# Altium PCB Alarm_LCD.PcbDoc
Units mm, origin at the board's own origin, x right, y up, seen from the top; angles counter-clockwise.
Board outline 81.15 x 80.9 mm, 2 copper layers (Top Layer, Bottom Layer); 28 components, 25 nets, 112 pads, 0 vias.
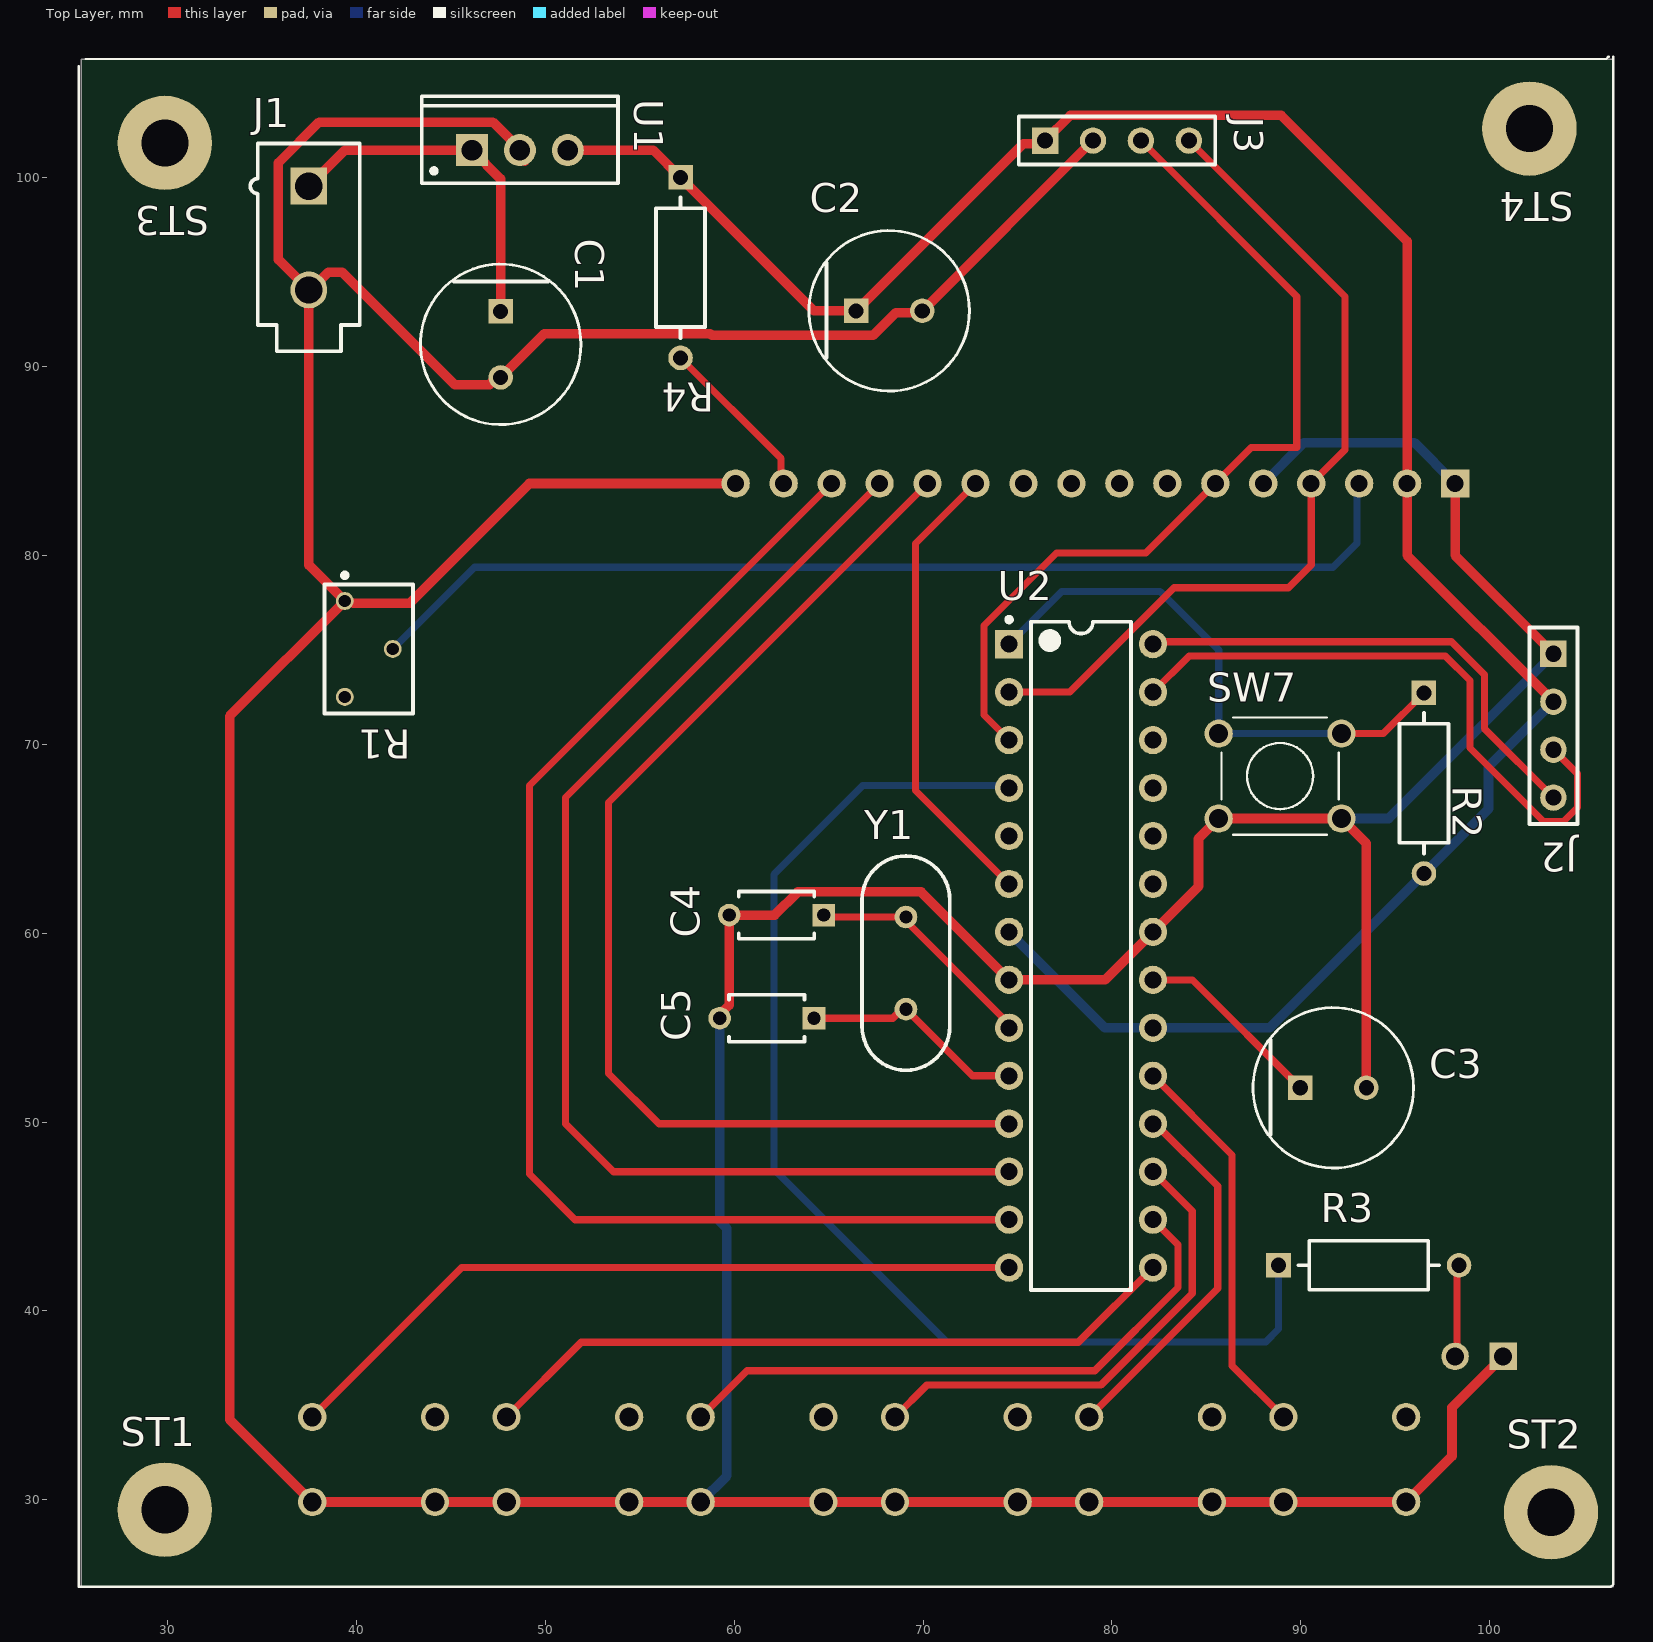
[diagram p0: Top Layer view]
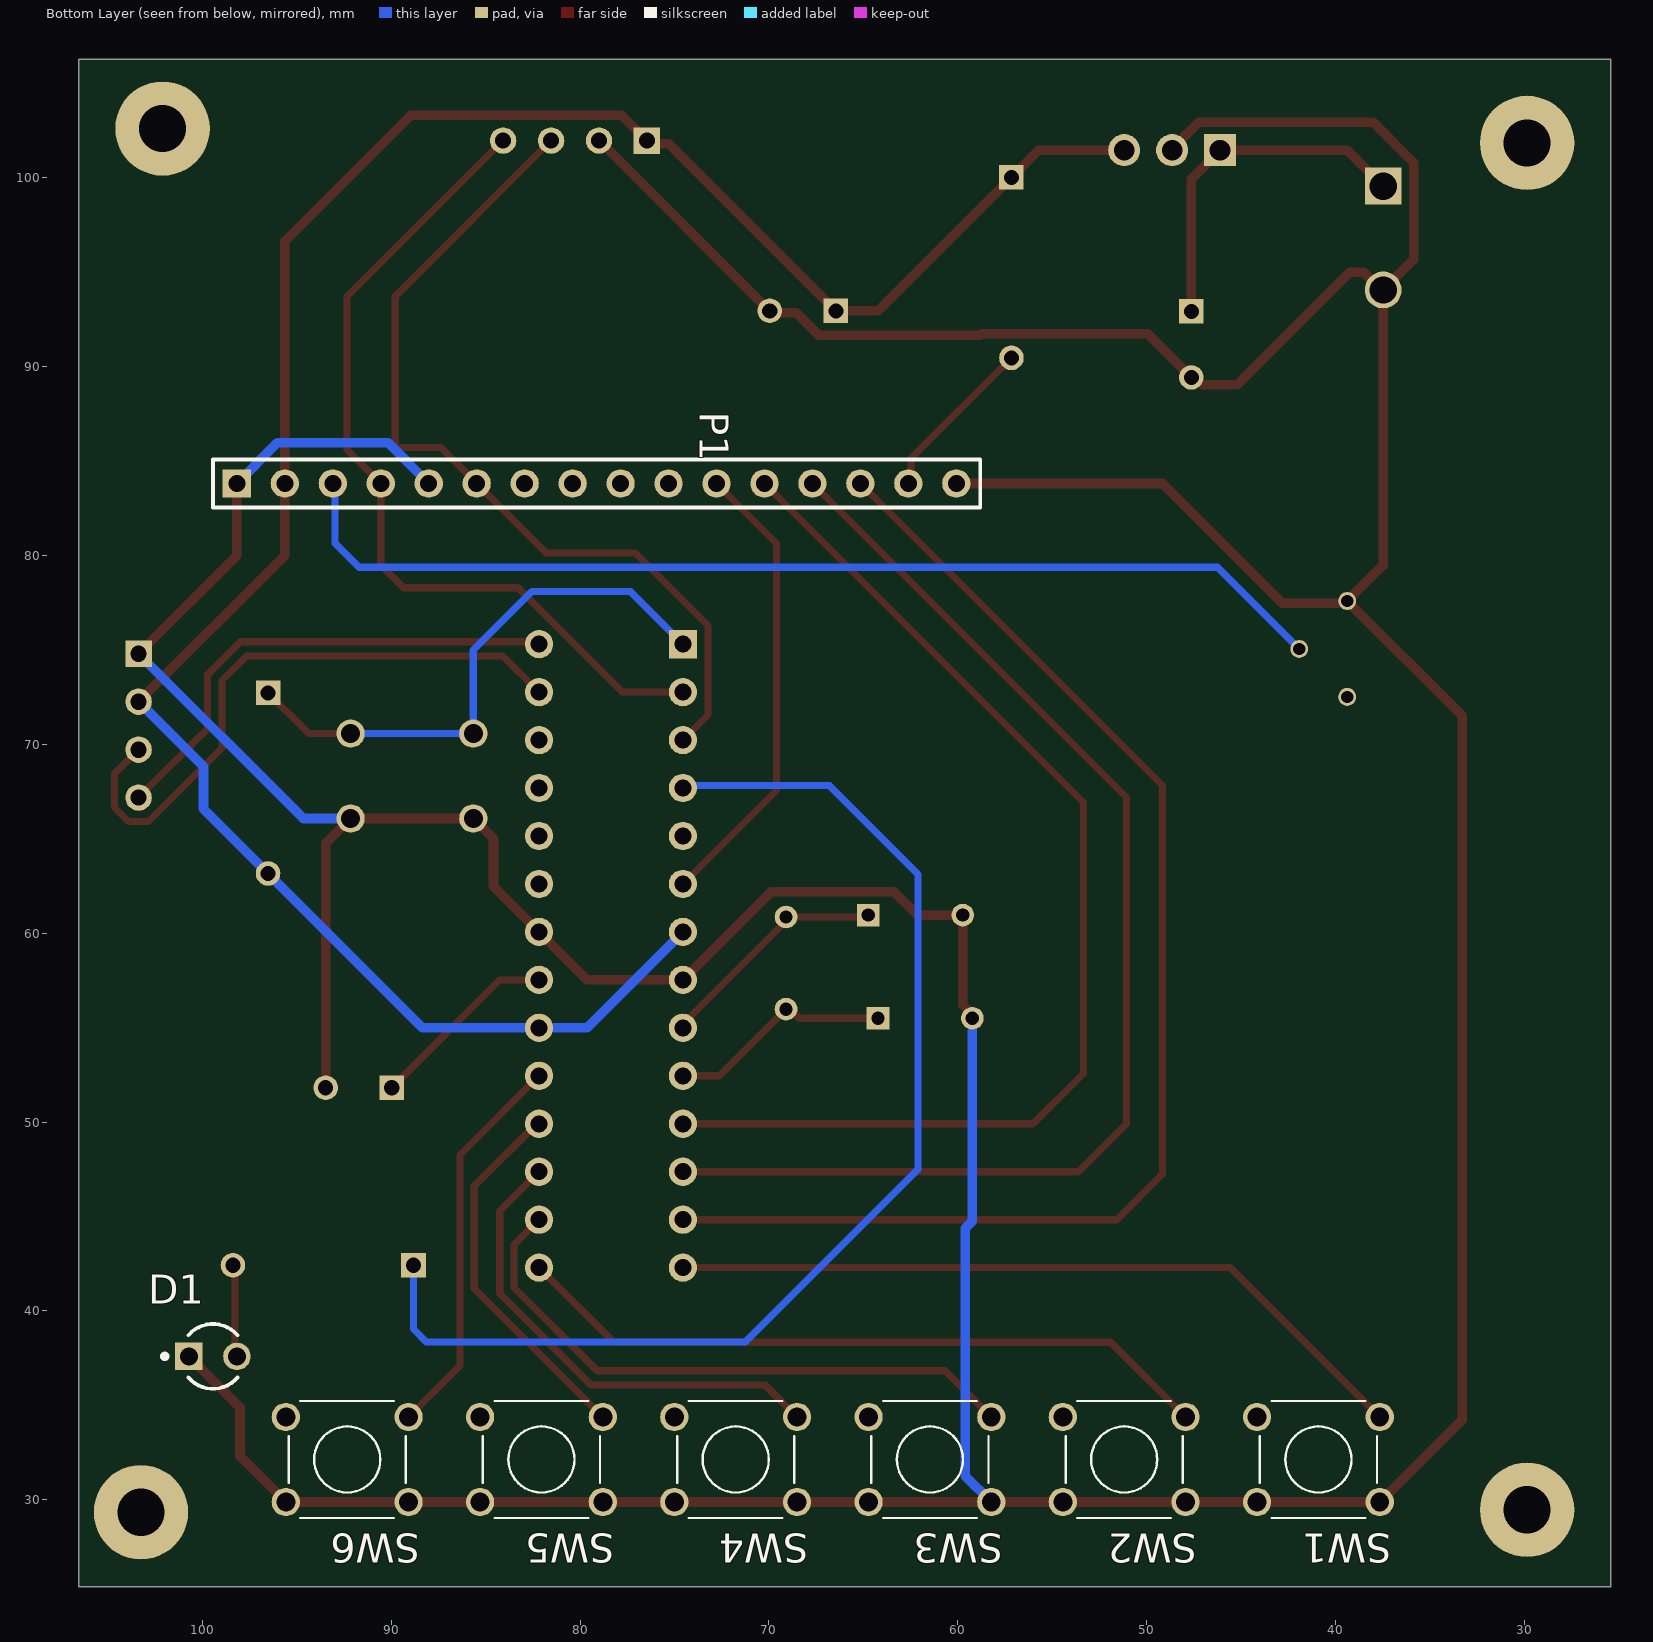
[diagram p1: Bottom Layer view, seen from below]
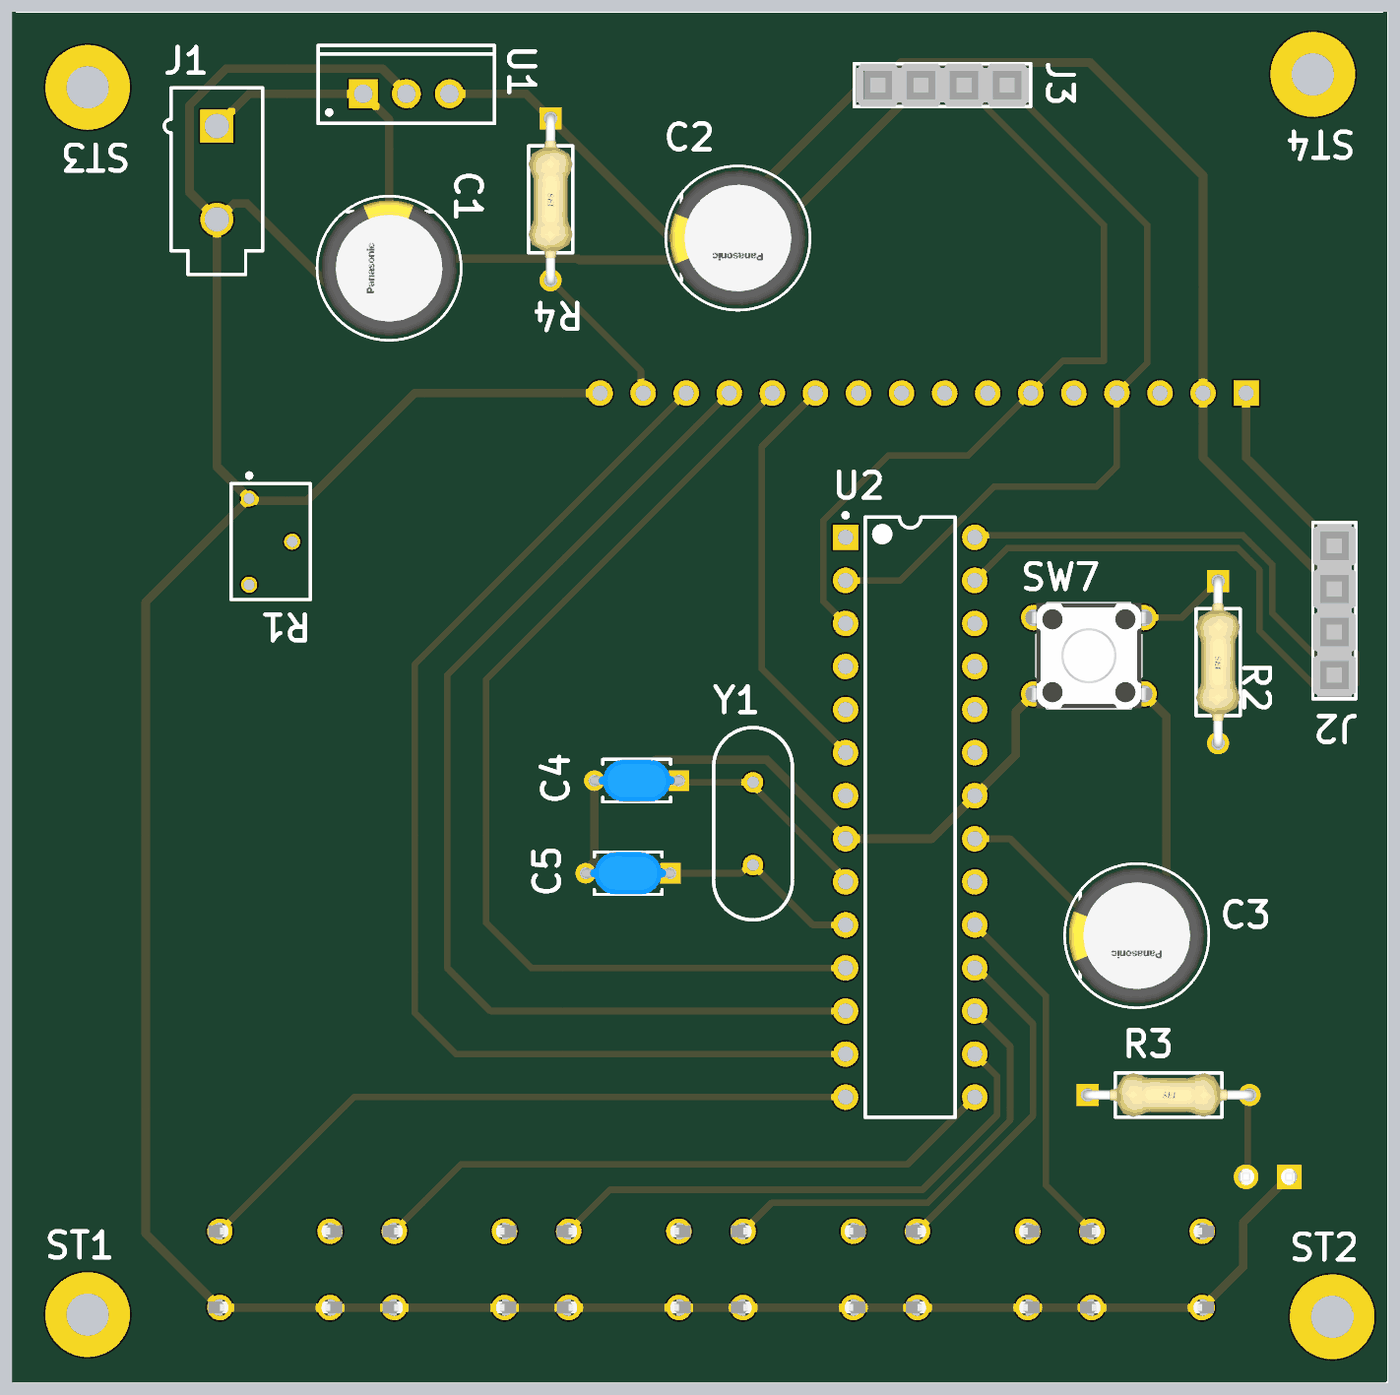
[diagram p2: 3D render of the assembled board from above, using the file's embedded part models]
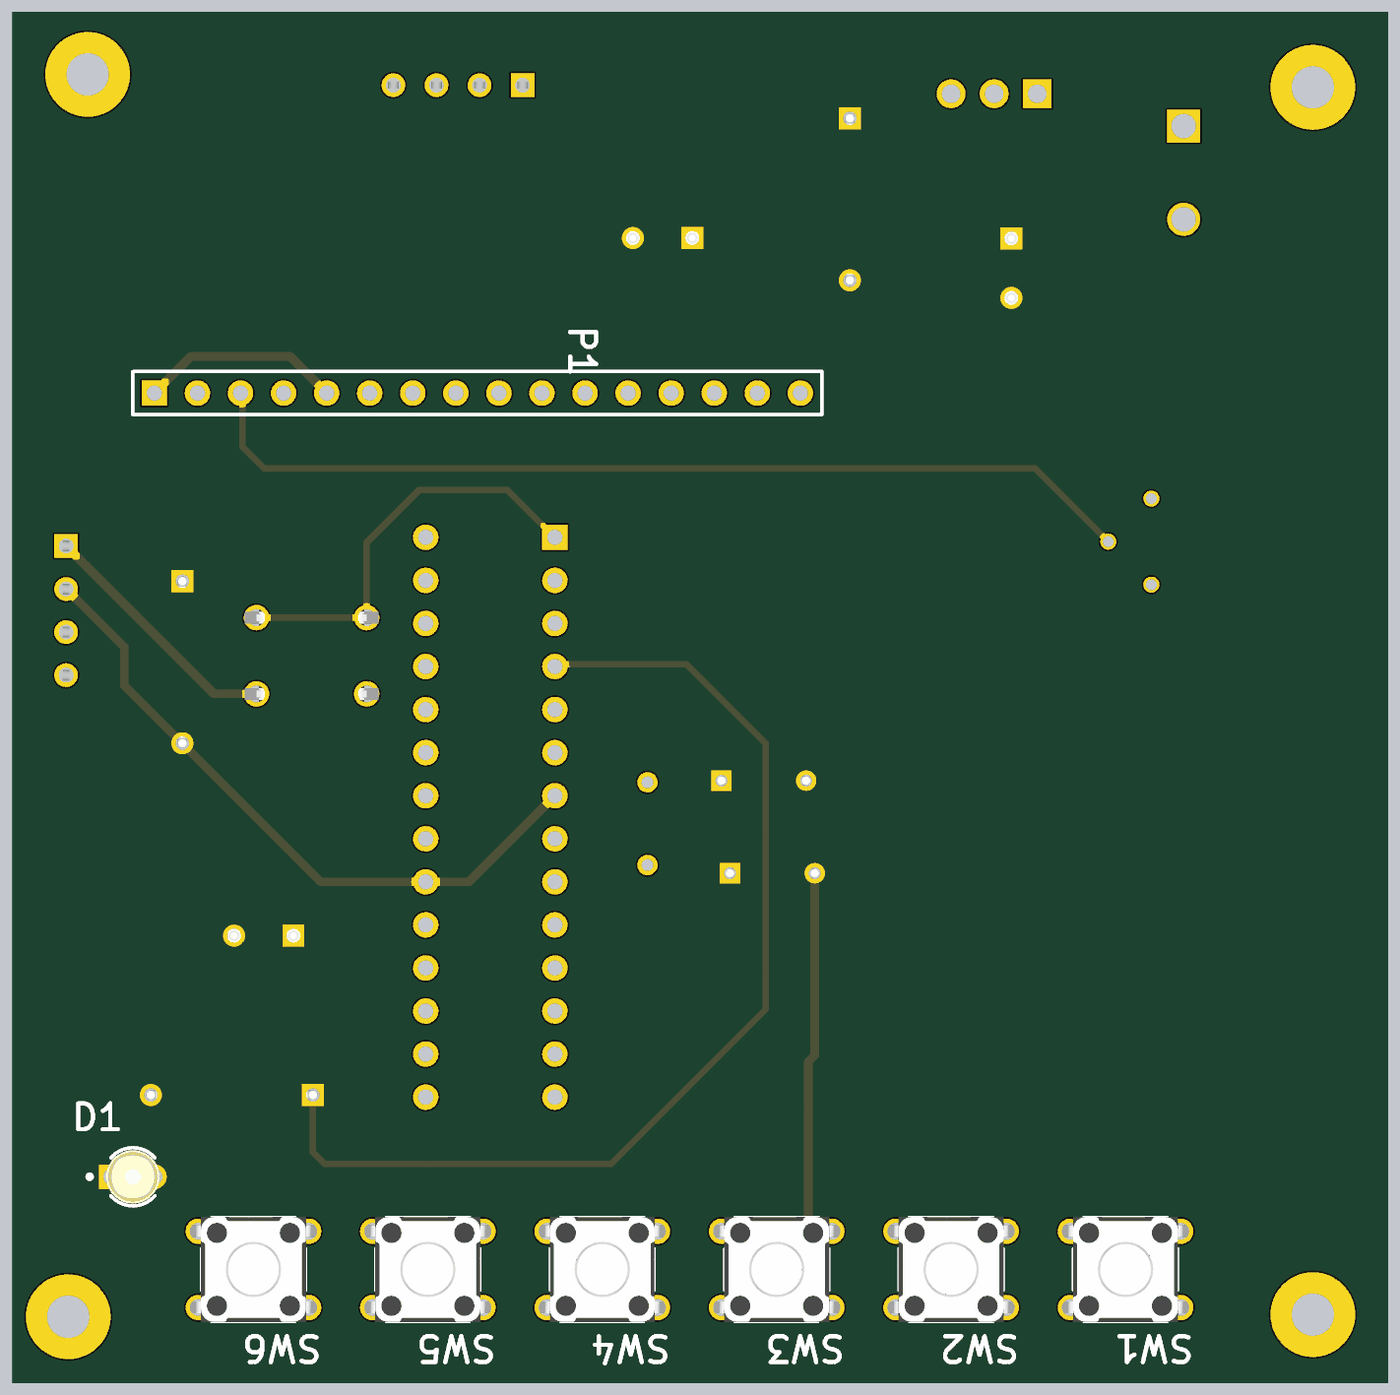
[diagram p3: 3D render of the assembled board from below, using the file's embedded part models]

## Layer stack, top to bottom
Top Solder: solder mask 0.0102, Solder Resist, Dk 3.5
Top Layer: signal copper 0.0356
Dielectric 1: dielectric 0.32, FR-4, Dk 4.8
Bottom Layer: signal copper 0.0356
Bottom Solder: solder mask 0.0102, Solder Resist, Dk 3.5

## Board outline
25.4,25.4 106.553,25.4 106.553,106.299 25.4,106.299

## Design rules (kind name [scope] priority, off if disabled: settings)
AssemblyTestPointUsage [All] p1: valid=2
Clearance [All] p1: gap=0.381 ignorepadtopadclearanceinfootprint=FALSE except(0.508: Arc-Hole Track-Hole SMDPad-Hole THPad-Hole Via-Hole Fill-Hole Poly-Hole Region-Hole Text-Hole)
FabricationTestPointUsage [All] p1: valid=2 allowmultiple=FALSE
PolygonConnect [All] p1: connectstyle=Relief reliefconductorwidth=0.254 reliefentries=4 polygonreliefangle="90 Angle" airgapwidth=0.254
RoutingVias [All] p1: holewidth=0.711 width=1.27 viastyle="Through Hole" minholewidth=0.711 minwidth=1.27 maxholewidth=0.711 maxwidth=1.27
SilkToSilkClearance [All] p1: silktosilkclearance=0.203
SilkToSolderMaskClearance [IsPad] p1: minsilkscreentomaskgap=0.127 clearancetoexposedcopper=TRUE
SolderMaskExpansion [All] p1: expansion=0.102 istentingtop=FALSE
Width Width_1 [InNet('5V') or InNet('GND') or InNet('VCC')] p1: maxlimit=0.635 minlimit=0.381 preferedwidth=0.508
Width [All] p2: maxlimit=0.508 minlimit=0.254 preferedwidth=0.381
26 further rules are at their usual default settings.

## Components (designator, comment, footprint, x,y, rotation, side; value= is the part's Value field where it differs from the comment)
C1 "330nF" FP-EEU-FC1V221L-MFG 47.625,91.186 r270 top
C2 "100nF" FP-EEU-FC1V221L-MFG 68.199,92.964 r0 top
C3 "100nF" FP-EEU-FC1V221L-MFG 91.722,51.816 r0 top
C4 "22pF" FP-RDE0M1-MFG 62.23,60.96 r180 top
C5 "22pF" FP-RDE0M1-MFG 61.722,55.499 r180 top
D1 "HLMP-1719" FP-HLMP-1719-MFG 99.441,37.592 r180 bottom
J1 "39-28-1023" MOLX-39-28-1023-2_V 37.465,96.818 r0 top
J2 "SLW-104-01-T-S" SMTC-SLW-104-01-X-S 103.378,74.803 r270 top
J3 "SLW-104-01-T-S" SMTC-SLW-104-01-X-S 76.454,101.981 r0 top
P1 "Header 16" HDR1X16 98.171,83.82 r180 bottom
R1 "3266W-1-104LF" BOUR-3266W-3_V 40.64,75.057 r270 top
R2 "10K" FP-CF14-MFG 96.52,67.945 r270 top
R3 "330" FP-CF14-MFG 93.599,42.418 r0 top
R4 "330" FP-CF14-MFG 57.15,95.25 r270 top
ST1 "PTH-M2D5X5" PTH-M2D5X5 29.845,29.464 r0 top
ST2 "PTH-M2D5X5" PTH-M2D5X5 103.251,29.337 r0 top
ST3 "PTH-M2D5X5" PTH-M2D5X5 29.845,101.854 r180 top
ST4 "PTH-M2D5X5" PTH-M2D5X5 102.108,102.616 r180 top
SW1 "430186070716" 430186070716 40.894,32.131 r0 bottom
SW2 "430186070716" 430186070716 51.181,32.131 r0 bottom
SW3 "430186070716" 430186070716 61.468,32.131 r0 bottom
SW4 "430186070716" 430186070716 71.755,32.131 r0 bottom
SW5 "430186070716" 430186070716 82.042,32.131 r0 bottom
SW6 "430186070716" 430186070716 92.329,32.131 r0 bottom
SW7 "430186070716" 430186070716 88.9,68.326 r0 top
U1 "L7805CV" TO220 48.641,101.473 r0 top
U2 "ATmega328P-PU" 28P3 78.359,58.801 r0 top
Y1 "FOXSLF/120-20" FOX-FOXSLF-2_V 69.088,58.42 r90 top

## Footprints (in the part's own frame and the unit in brackets; to place one, negate y for a bottom-side part, rotate by r counter-clockwise, add the part's x,y. Pads: shape width x height; smd on the part's side, far side on the other; paste and mask are expansions set on the pad)
28P3 [mm] "28-Pin Plastic Dual In-Line Package (PDIP)"
  rect 1.5x1.5 hole 0.9: 1(-3.81,16.51)
  round 1.5 hole 0.9: 2(-3.81,13.97) 3(-3.81,11.43) 4(-3.81,8.89) 5(-3.81,6.35) 6(-3.81,3.81) 7(-3.81,1.27) 8(-3.81,-1.27) 9(-3.81,-3.81) 10(-3.81,-6.35) 11(-3.81,-8.89) 12(-3.81,-11.43) 13(-3.81,-13.97) 14(-3.81,-16.51) 15(3.81,-16.51) 16(3.81,-13.97) 17(3.81,-11.43) 18(3.81,-8.89) 19(3.81,-6.35) 20(3.81,-3.81) 21(3.81,-1.27) 22(3.81,1.27) 23(3.81,3.81) 24(3.81,6.35) 25(3.81,8.89) 26(3.81,11.43) 27(3.81,13.97) 28(3.81,16.51)
  silkscreen extent -3.93,-17.7 2.65,17.93, body extent -3.6,-17.65 3.6,17.65, height 4.58
430186070716 [mm] "6*6mm vertical type, THT, height 7.0mm, black actuator, 160gf, Bulk"
  round 1.5 hole 1: 1(-3.25,2.25) 2(-3.25,-2.25) 3(3.25,2.25) 4(3.25,-2.25)
  silkscreen extent -3.1,-3.1 3.1,3.1, body extent -3.95,-3.1 3.95,3.1, height 7.01
BOUR-3266W-3_V [mm] "THD, 3-Leads, Body 6.6x4.69mm, Pitch 2.54mm"
  round 0.95 hole 0.65: 1(-2.54,-1.27) 2(0,1.27) 3(2.54,-1.27)
  silkscreen extent -4.02,-2.34 3.41,2.34, body extent -3.3,-2.35 3.3,2.35, height 8.51
FOX-FOXSLF-2_V [mm] "THD, 2-Leads, Body 11.35x4.65mm, Pitch 4.88mm"
  round 1.2 hole 0.7: 1(-2.44,0) 2(2.44,0)
  silkscreen extent -5.68,-2.33 5.68,2.33, body extent -5.67,-2.32 5.68,2.32, height 3.6
FP-CF14-MFG [mm]
  rect 1.3x1.3 hole 0.8 paste-1000 mask+0: 1(-4.78,0)
  round 1.3 hole 0.8 paste-1000 mask+0: 2(4.78,0)
  silkscreen extent -3.73,-1.3 3.73,1.3, body extent -5.53,-1.4 5.53,1.4, height 0.25
FP-EEU-FC1V221L-MFG [mm]
  rect 1.3x1.3 hole 0.8 paste-1000 mask+0: 1(-1.75,0)
  round 1.3 hole 0.8 paste-1000 mask+0: 2(1.75,0)
  silkscreen extent -4.25,-4.25 4.25,4.25, body extent -4.35,-4.35 4.35,4.35, height 0.25
FP-HLMP-1719-MFG [mm]
  rect 1.45x1.45 hole 0.95 paste-1000 mask+0: 1(-1.27,0)
  round 1.45 hole 0.95 paste-1000 mask+0: 2(1.27,0)
  silkscreen extent -2.68,-1.71 1.3,1.71, body extent -1.59,-1.59 1.6,1.59, height 8.47
FP-RDE0M1-MFG [mm]
  rect 1.2x1.2 hole 0.7 paste-1000 mask+0: 1(-2.5,0)
  round 1.2 hole 0.7 paste-1000 mask+0: 2(2.5,0)
  silkscreen extent -2,-1.25 2,1.25, body extent -3.2,-1.35 3.2,1.35, height 0.25
HDR1X16 [mm] "Connector; Header; 16 Position"
  rect 1.5x1.5 hole 0.9: 1(0,0)
  round 1.5 hole 0.9: 2(2.54,0) 3(5.08,0) 4(7.62,0) 5(10.16,0) 6(12.7,0) 7(15.24,0) 8(17.78,0) 9(20.32,0) 10(22.86,0) 11(25.4,0) 12(27.94,0) 13(30.48,0) 14(33.02,0) 15(35.56,0) 16(38.1,0)
  silkscreen extent -1.27,-1.27 39.37,1.27
MOLX-39-28-1023-2_V [mm] "THD, 2-Leads, Body 11x5.8mm"
  rect 1.95x1.95 hole 1.45: 1(0,2.75)
  round 1.95 hole 1.45: 2(0,-2.75)
  silkscreen extent -3.1,-6 2.7,5, body extent -3.1,-6 2.7,5, height 13.6
PTH-M2D5X5 [mm]
  round 5 hole 2.5: 1(0,0)
SMTC-SLW-104-01-X-S [mm] "Low Profile Socket Strip, 1x4 Pins, Vertical, 2.54mm Pitch, Female"
  rect 1.4x1.4 hole 0.86: 1(0,0)
  round 1.4 hole 0.86: 2(2.54,0) 3(5.08,0) 4(7.62,0)
  silkscreen extent -1.4,-1.27 9.02,1.27, body extent -1.27,-1.27 8.89,1.27, height 4.57
TO220 [mm] "TO, Thru-Hole, Vertical, Heatsink Mounted; 3 In-Line Leads; Pitch 2.54 mm"
  rect 1.7x1.7 hole 1.1: 1(-2.54,0)
  round 1.7 hole 1.1: 2(0,0) 3(2.54,0)
  silkscreen extent -5.2,-1.75 5.2,2.85, body extent -5.25,-1.8 5.25,2.9, height 19.7

## Part data
C1 C2 C3: library part CMP-05427-000010-1, "CAP ALUM 220UF 20% 35V RADIAL", Leakage Current=77uA, Manufacturer="Panasonic Electronic Components", Manufacturer Part Number=EEU-FC1V221L, Package=0, Ripple Current=730mA, Temperature="-55°C to +105°C", Temperature Range High=+105°C, Temperature Range Low=-55°C, Tolerance=20%, Voltage Rating=35V, Automotive=Yes, Automotive Grade="Grade 2", Category=Cap, ComponentLink2Description=Datasheet, ComponentLink2URL=https://industrial.panasonic.com/cdbs/www-data/pdf/RDF0000/ABA0000C1209.pdf, Device Class L1="Passive Components", Device Class L2=Capacitors, Device Class L3="Aluminum Electrolytic Capacitors", Digikey Description="CAP ALUM 220UF 20% 35V RADIAL", Dissipation Factor=12%, Esr=0.085Ω, Height=16.5mm, Lead Free=Yes, Life=2000Hours, Material=Aluminum, Mouser Description="Capacitor; Aluminum Electrolytic; Fc Radial Elec Cap 220uF 35V", Octopart=https://octopart.com/eeu-fc1v221l-panasonic-39478519, RoHS=TRUE
  C1: Capacitance=330nF
  C2 C3: Capacitance=100nF
C4 C5: library part CMP-06035-051680-1, "Ceramic Capacitor 100nF ±10% 50V X7R Radial", Case/Package=Radial, Dielectric=X7R, Max Operating Temperature=125°C, Min Operating Temperature=-55°C, Package Quantity=2000, Resistor Type=Ceramic, Tolerance=10%, Voltage Rating=50V, Capacitance=22pF, Height=3.5mm, Height - Seated (Max)=0.236inch, Lead Diameter=0.5mm, Lead Free="Lead Free", Lead Pitch=0.197inch, Lead/Base Style=Kinked, Length=0.157inch, Mount="Through Hole", Packaging="Tape and Reel", Termination=Radial, Voltage Rating (DC)=50V, Width=3.5mm
D1: library part CMP-2000-06410-2, "LED YELLOW DIFFUSED T-1 T/H", Colour=Yellow, Forward Current=2mA, Forward Voltage=1.8V, Manufacturer=Broadcom, Package=0, Power Dissipation=17.5mW, Reverse Voltage=5V, Temperature="-40°C to +100°C", Temperature Range High=+100°C, Temperature Range Low=-40°C, Automotive=No, Category=Diode, ComponentLink2Description=Datasheet, ComponentLink2URL=https://docs.broadcom.com/docs/AV02-1557EN, Device Class L1=Optoelectronics, Device Class L2=LEDs, Device Class L3=unset, Digikey Description="LED YELLOW DIFFUSED T-1 T/H", Lead Free=Yes, Led Orientation=Straight, Luminous Intensity=2.1mcd, Manufacturer Part Number=HLMP-1719, Mouser Description="Standard LEDs - Through Hole Yellow Diffused 585nm 2.1mcd", Octopart=https://octopart.com/hlmp-1719-broadcom-71130405, RoHS=TRUE, Viewing Angle=50°, Wavelength=585nm
J1: library part CMP-2000-05244-1, "Female Header, Pitch 4.2 mm, 1 x 2 Position, Height 12.8 mm, Tail Length 3.5 mm, -40 to 105 degC, RoHS", Colour=Clear, Current Rating=13A, Flammability Rating=UL94V-2, Manufacturer=Molex, Voltage Rating V AC=600V, Working Voltage=250V, Connector Body Material=–, Connector Insert Type=Header, Connector Mounting=PCB, Connector Mounting Orientation=PCB, Connector Type=RectangularPower, Contact Gender=–, Contact Material=Brass, Contact Plating=Tin, Contact Termination=Solder, Datasheet URL=https://datasheet.ciiva.com/11746/0900766b80460d9e-11746456.pdf, Datasheet Version="Rev. F, 05/2004", Gender=Header, Lead Spacing=4.2mm, Manufacturer URL=http://www.molex.com/, Mounting Orientation=Straight, Mounting Type=PCBoard, MSL=–, No. of Contacts=4, No. of Poles=2, No. of Rows=1, No. of Ways=2, Pitch Spacing=4.2mm, Series=Mini-FitJr, SVHC=–, Termination Method=Solder
J2 J3: library part CMP-1023-00131-1, "Low Profile Socket Strips, Through-hole, Vertical, -55 to 105 degC, 2.54 mm Pitch, 4-Pin, Female, RoHS", Manufacturer=Samtec, Temperature Range="-55 to 105 degC", ComponentLink1Description="Manufacturer URL", ComponentLink1URL=http://www.samtec.com, ComponentLink2Description=Datasheet, ComponentLink2URL=http://www.samtec.com/documents/webfiles/pdf/SLW.PDF, ComponentLink3Description="Package Specification", ComponentLink3URL=http://www.samtec.com/documents/webfiles/cpdf/SLW-1XX-01-X-X-MKT.pdf, DatasheetVersion=F-214, Mounting Technology=Through-hole, Orientation=Vertical, PackageDescription="Low Profile Socket Strip", PackageReference=SLW-104-01-X-S, PackageVersion="X, 9/1987", PartNumber=SLW-104-01-T-S, Pitch="2.54 mm", RoHS=True
P1: "Header, 16-Pin", LatestRevisionDate=17-Jul-2002, LatestRevisionNote="Re-released for DXP Platform.", Publisher="Altium Limited"
R1: library part CMP-0975-00021-1, "Square Trimpot Trimming Potentiometer, 100 KOhm, 0.25 W, -55 to 125 degC, 3-Pin THD, RoHS, Tube", Manufacturer=Bourns, Operating Temperature="-55 to 125 degC", Power Rating@70 degC="0.25 W", Resistance="100 kOhm", Tolerance=+/-10%, ComponentLink1Description="Manufacturer URL", ComponentLink1URL=https://www.bourns.com/, ComponentLink2Description=Datasheet, ComponentLink2URL=https://www.bourns.com/data/global/pdfs/3266.pdf, ComponentLink3Description="Package Specification", ComponentLink3URL=https://www.bourns.com/data/global/pdfs/3266.pdf, DatasheetVersion=Apr-14, Mounting Technology="Through Hole", PackageDescription="3-Pin THD, Body 6.35 x 4.31 mm, Pitch 2.54 mm", Packing=Tube, PartNumber=3266W-1-104LF, RoHS=TRUE
R2 R3 R4: library part CMP-26528-000003-1, "RES 7.5K OHM 1/4W 5% AXIAL", Case/Package=Axial, Max Operating Temperature=155°C, Max Power Dissipation=250mW, Min Operating Temperature=-55°C, Resistor Type="Carbon Film", Temperature Coefficient=-400ppm/°C, Tolerance=5%, Contact Plating=Tin, Diameter=2.3mm, Features="Flame Retardant Coating", Lead Free="Lead Free", Length=0.256inch, Mount="Through Hole", Number of Terminations=2, Packaging="Tape and Reel", Power Rating=250mW, Radiation Hardening=No, RoHS Compliant=Yes, Series=CF
  R2: Resistance=10K
  R3 R4: Resistance=330
ST1 ST2 ST3 ST4: library part CMP-00028-00004-1, "M2 PTH (2.5mm), 5mm pad", Pins=1
SW1 SW2 SW3 SW4 SW5 SW6 SW7: library part CMP-1453-00013-1, "WS-TATV THT Tact Switch 6X6 mm", Manufacturer="Wuerth Elektronik", ComponentLink1Description="Manufacturer URL", ComponentLink1URL=http://www.we-online.com, ComponentLink2Description=Datasheet, ComponentLink2URL=http://katalog.we-online.de/em/datasheet/4301x6.pdf, NoPins=04, PackageReference=430186070716, PartNumber=430186070716
U1: library part CMP-019-00018-2, "Positive Voltage Regulator IC, 1.5 A, 5 V, 0 to 125 degC, 3-Pin TO-220, RoHS, Tube", Case/Package=TO-220, Dropout Voltage=2V, Manufacturer=STMicroelectronics, Max Input Voltage=35V, Max Operating Temperature=125°C, Max Ouput Current=1.5A, Max Supply Voltage=20V, Min Input Voltage=7V, Min Operating Temperature=0°C, Min Supply Voltage=8V, Nominal Output Voltage=5V, Package Quantity=50, Datasheet URL=https://datasheet.ciiva.com/15111/getdatasheetpartid-44136-15111027.pdf, Datasheet Version="Rev 30, 09/2012", Manufacturer URL=http://www.st.com/, Mounting Technology=TH, Output Current=1.5A, Output Voltage=5V, Outputs=1, Packaging=Rail/Tube, Pins=3, RoHS Compliant=True
U2: library part CMP-0095-00013-2, "8-bit AVR Microcontroller, 32KB Flash, 1KB EEPROM, 2KB SRAM, 28-pin PDIP, Industrial Grade (-40°C to 85°C)", ComponentLink1Description="Manufacturer URL", ComponentLink1URL=http://www.atmel.com/, ComponentLink2Description="ATmega48A/48PA/88A/88PA/168A/168PA/328/328P Datasheet", ComponentLink2URL=http://www.atmel.com/dyn/resources/prod_documents/8271.pdf, ComponentLink3Description="ATmega48A/48PA/88A/88PA/168A/168PA/328/328P Summary", ComponentLink3URL=http://www.atmel.com/dyn/resources/prod_documents/8271S.pdf, DatasheetVersion="revD, May-2011", PackageDescription="28-lead (0.300\"/7.62mm Wide) Plastic Dual Inline Package (PDIP)", PackageReference=28P3, PackageVersion="revB, Sep-2001", RevisionNote="DatasheetVersion updated. URLs added."
Y1: library part CMP-1749-00004-1, "Resistance Weld Thru-Hole Crystal, 12 MHz, +/-30 ppm, -20 to 70 degC, 2-Pin THD, RoHS, Bulk", Case\Package=TO-251-3, Input Capacitance="350 pF", Max Operating Temperature="150 degC", Max Power Dissipation="2.5 W", Min Operating Temperature="-55 degC", Package Quantity=70, ComponentLink1Description="Manufacturer URL", ComponentLink1URL=http://www.foxonline.com/, ComponentLink2Description=Datasheet, ComponentLink2URL=http://www.foxonline.com/pdfs/hc49slf.pdf, DatasheetVersion=Mar-15, Elements=1, Height="6.1 mm", Length="6.6 mm", Mount="Through Hole", PackageDescription="2-Pin Through Hole Device, Body 11.35 x 4.65 mm, Pitch 4.88 mm", PackageReference=FOXSLF-2, Packaging=Rail/Tube, Pins=3, Radiation Hardening=No, Rds On Max="115 mohm", REACH SVHC="No SVHC", RoHSCompliant=true, Typical Rise Time="90 ns", Width="2.3 mm"

## Nets (pads, with @x,y where several pads share a name; then routed paths per layer and width w, separated by ;. In a path a pad name is that pad's centre, name@x,y a point inside that pad or via, vN(x,y) a via of type N, cw(c..) or ccw(c..) an arc to the next point about the centre after c; other vN are vias at no path point)
5V: C2.1 J2.2 J3.1 P1.2 R2.2 R4.1 U1.3 U2.7 U2.20 | length 122.2
  Top Layer w0.508: U1.3@51.054,101.346 U1.3 55.707,101.473 R4.1 64.216,92.964 C2.1 75.29,101.805 76.278,101.805 J3.1 77.789,103.316 88.962,103.316 95.631,96.647 95.631,80.01 J2.2
  Bottom Layer w0.508: U2.7 79.629,54.991 U2.20 88.346,54.991 R2.2 99.939,66.584 99.939,68.824 J2.2
ALARM: SW5.2 U2.18 | length 19.8
  Top Layer w0.381: SW5.2 85.598,41.187 85.598,46.609 82.296,49.911 U2.18
BACK: SW6.2 U2.19 | length 20.9
  Top Layer w0.381: U2.19 86.36,48.26 86.36,37.1 SW6.2
D0: J3.4 P1.4 U2.2 | length 45.4
  Top Layer w0.381: U2.2 77.76,72.771 83.285,78.295 89.344,78.295 90.551,79.502 P1.4 92.338,85.607 92.338,93.717 J3.4
D1: J3.3 P1.6 U2.3 | length 46.8
  Top Layer w0.381: U2.3 73.227,71.553 73.227,76.298 77.065,80.135 81.786,80.135 87.376,85.725 89.789,85.725 89.789,93.726 J3.3
D4: P1.11 U2.6 | length 24.6
  Top Layer w0.381: P1.11 69.596,80.645 69.596,67.564 U2.6
D5: P1.12 U2.11 | length 60.6
  Top Layer w0.381: P1.12 53.34,66.929 53.34,52.578 56.007,49.911 U2.11
D6: P1.13 U2.12 | length 65.5
  Top Layer w0.381: P1.13 51.054,67.183 51.054,49.911 53.594,47.371 U2.12 U2.12@74.422,47.498
D7: P1.14 U2.13 | length 69.6
  Top Layer w0.381: P1.14 49.149,67.818 49.149,47.244 51.562,44.831 U2.13
DEC: SW3.2 U2.16 | length 32.3
  Top Layer w0.381: SW3.2 60.667,36.83 79.086,36.83 83.491,41.235 83.491,43.509 U2.16
GND: C1.2 C2.2 C3.2 C4.2 C5.2 D1.1 J1.2 J2.1 J3.2 P1.1 P1.5 P1.16 R1.1 SW1.1 SW1.3 SW2.1 SW2.3 SW3.1 SW3.3 SW4.1 SW4.3 SW5.1 SW5.3 SW6.1 SW6.3 SW7.2 SW7.4 U1.2 U2.8 U2.22 | length 357.6
  Top Layer w0.508: U1.2@48.91,100.881 48.641,101.15 U1.2 48.641,101.531 47.214,102.958 38.007,102.958 35.855,100.806 35.855,95.678 J1.2 ; C5.2 59.222,55.686 59.73,56.194 C4.2 62.138,60.96 63.373,62.195 69.885,62.195 U2.8 79.629,57.531 U2.22 84.582,62.484 84.582,65.008 SW7.2 SW7.4 93.472,64.754 C3.2 ; P1.16 49.149,83.82 42.799,77.47 39.81,77.47 39.767,77.512 39.455,77.512 R1.1 ; J3.2 78.98,101.981 69.963,92.964 C2.2 69.839,92.854 68.537,92.854 67.362,91.679 58.798,91.679 58.722,91.755 49.944,91.755 C1.2 47.411,89.436 47.031,89.057 45.182,89.057 39.243,94.996 38.484,94.996 37.556,94.068 J1.2 ; P1.5@87.821,84.01 P1.5 ; P1.1 98.171,80.01 J2.1 ; D1.1 98.004,34.885 98.004,32.306 SW6.3 SW6.1 SW5.3 SW5.1 SW4.3 SW4.1 SW3.3 SW3.1 SW2.3 SW2.1 SW1.3 SW1.1 33.274,34.251 33.274,71.501 R1.1 ; J1.2 37.465,79.502 R1.1
  Bottom Layer w0.508: SW3.1 59.603,31.266 59.603,44.369 59.222,44.75 C5.2 ; P1.5 90.17,85.979 96.012,85.979 P1.1 ; SW7.4 94.651,66.076 J2.1
INC: SW2.2 U2.15 | length 37.5
  Top Layer w0.381: SW2.2 51.886,38.336 78.214,38.336 U2.15
LED: R3.1 U2.4 | length 64.2
  Bottom Layer w0.381: U2.4 74.422,67.818 66.802,67.818 62.103,63.119 62.103,47.498 71.247,38.354 88.138,38.354 88.819,39.035 R3.1
MODE: SW1.2 U2.14 | length 40.2
  Top Layer w0.381: SW1.2 45.554,42.291 U2.14
NetC3_1: C3.1 U2.21 | length 10.2
  Top Layer w0.381: U2.21 84.257,57.531 C3.1
NetC4_1: C4.1 U2.9 Y1.2 | length 12.8
  Top Layer w0.381: C4.1 64.83,60.86 Y1.2 69.088,60.656 74.549,55.195 U2.9 U2.9@74.246,54.991
NetC5_1: C5.1 U2.10 Y1.1 | length 12
  Top Layer w0.381: C5.1 68.385,55.499 68.866,55.98 Y1.1 72.617,52.451 U2.10
NetD1_2: D1.2 R3.2 | length 5.2
  Top Layer w0.381: D1.2 98.275,37.696 98.275,42.314 R3.2
  Bottom Layer w0.381: D1.2@97.882,37.592 D1.2
NetP1_3: P1.3 R1.2 | length 56.6
  Bottom Layer w0.381: R1.2 46.239,79.386 91.705,79.386 92.975,80.656 92.975,83.704 P1.3
NetP1_15: P1.15 R4.2 | length 8.9
  Top Layer w0.381: R4.2 62.478,85.142 62.478,83.953 P1.15
RESET: R2.1 SW7.1 SW7.3 U2.1 | length 30
  Top Layer w0.381: SW7.1@85.436,70.362 SW7.1 ; SW7.3 94.371,70.576 R2.1
  Bottom Layer w0.381: U2.1 77.343,78.105 82.55,78.105 85.65,75.005 SW7.1 SW7.3
SCL: J2.4 U2.28 | length 26.4
  Top Layer w0.381: U2.28 82.296,75.438 96.993,75.438 97.979,75.438 99.72,73.697 99.72,72.711 99.72,70.841 J2.4
SDA: J2.3 U2.27 | length 32.9
  Top Layer w0.381: U2.27 84.074,74.676 97.663,74.676 98.958,73.381 98.958,69.805 102.851,65.911 103.905,65.911 104.65,66.656 104.65,68.451 J2.3
SET: SW4.2 U2.17 | length 25.8
  Top Layer w0.381: SW4.2 70.192,36.068 79.401,36.068 84.253,40.919 84.253,45.287 U2.17
VCC: C1.1 J1.1 U1.1 | length 18.6
  Top Layer w0.508: J1.1 39.37,101.473 U1.1 47.625,99.949 C1.1
pads on no net: P1.7 P1.8 P1.9 P1.10 R1.3 ST1.1 ST2.1 ST3.1 ST4.1 SW1.4 SW2.4 SW3.4 SW4.4 SW5.4 SW6.4 U2.5 U2.23 U2.24 U2.25 U2.26

## Silkscreen, mask and mechanical layers (free items; w line width, h text height)
Top Overlay:
  lines w0.125: 25.273,105.918 25.273,25.4 106.426,25.4 106.553,25.527 106.553,106.426 ; 25.654,106.299 106.172,106.299 106.299,106.426